# Altium PCB PCB1.PcbDoc
Units mm, origin at the board's own origin, x right, y up, seen from the top; angles counter-clockwise.
Board outline 37.09 x 46.66 mm, 2 copper layers (Top Layer, Bottom Layer); 13 components, 15 nets, 49 pads, 48 vias.
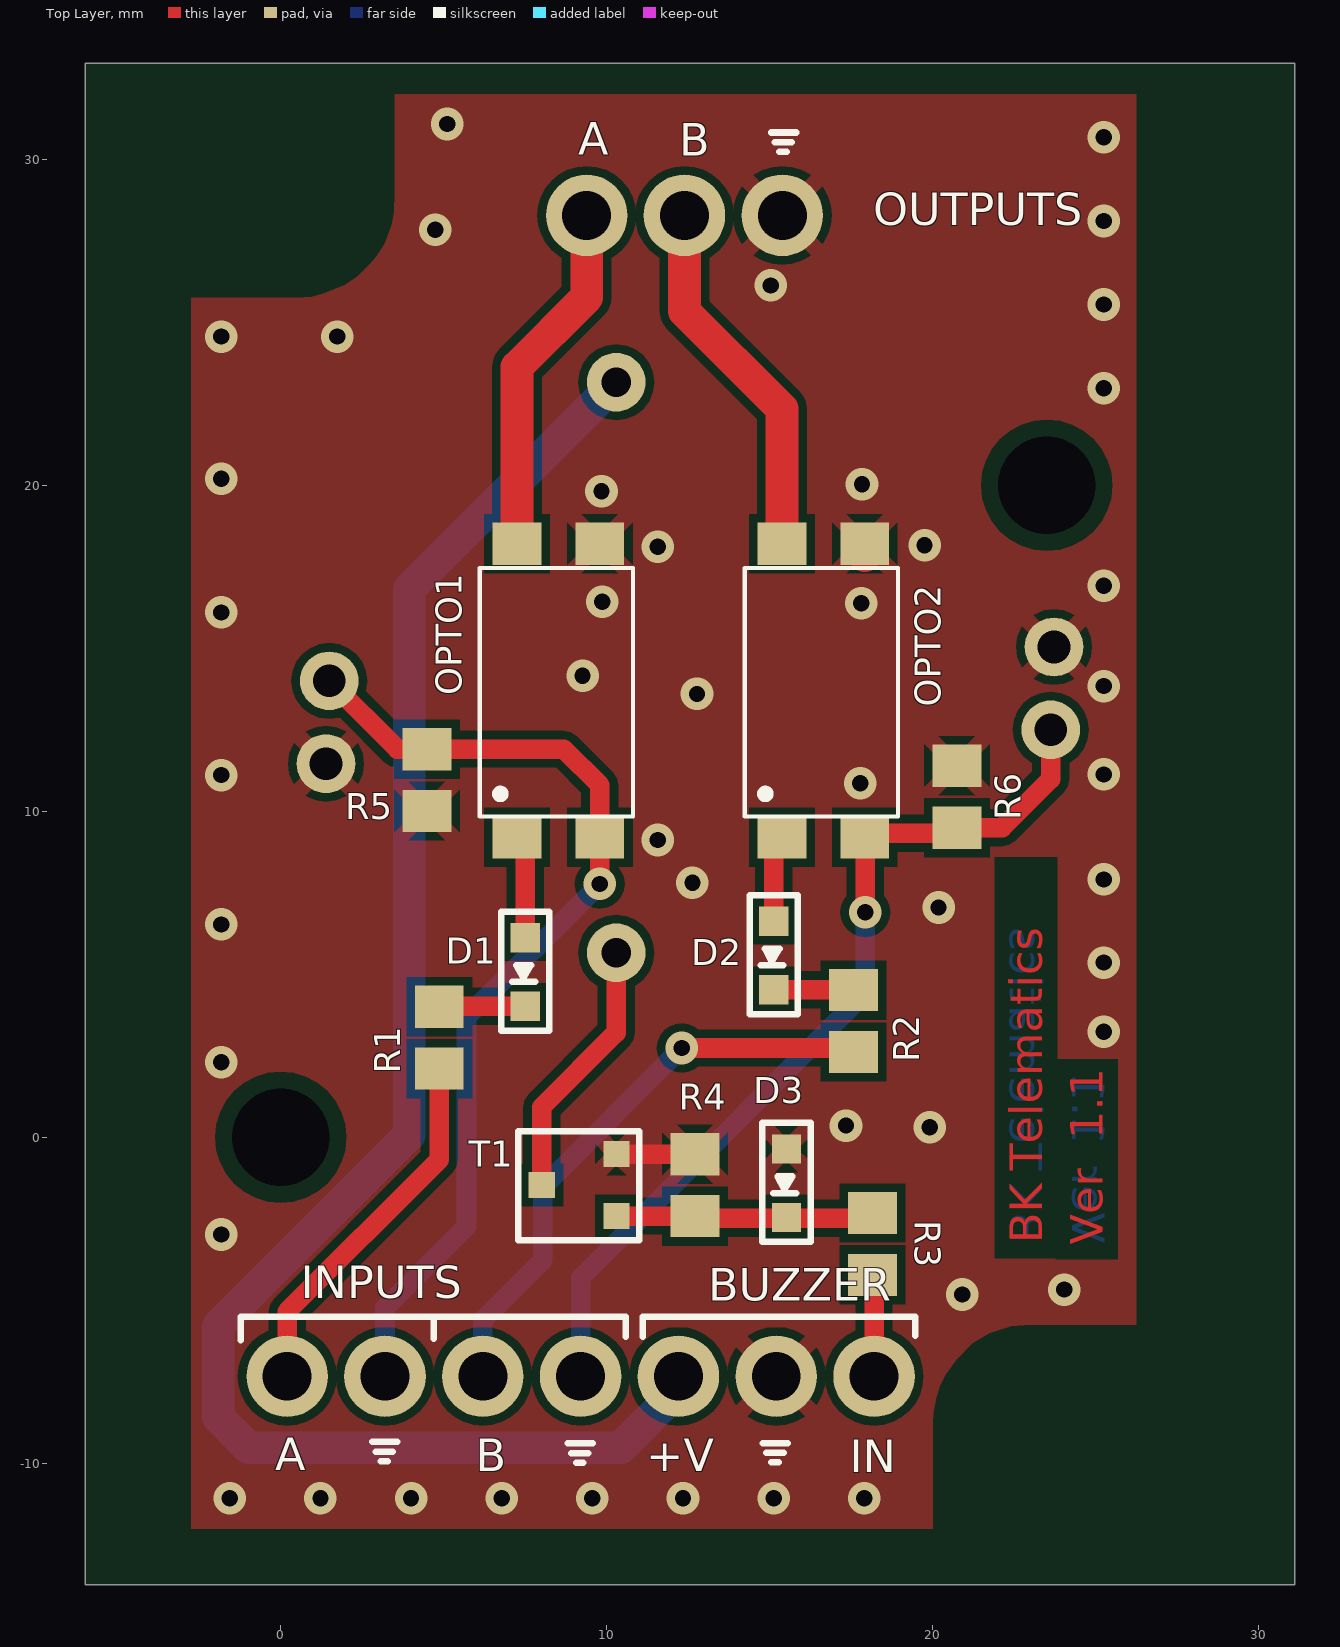
[diagram p0: Top Layer view]
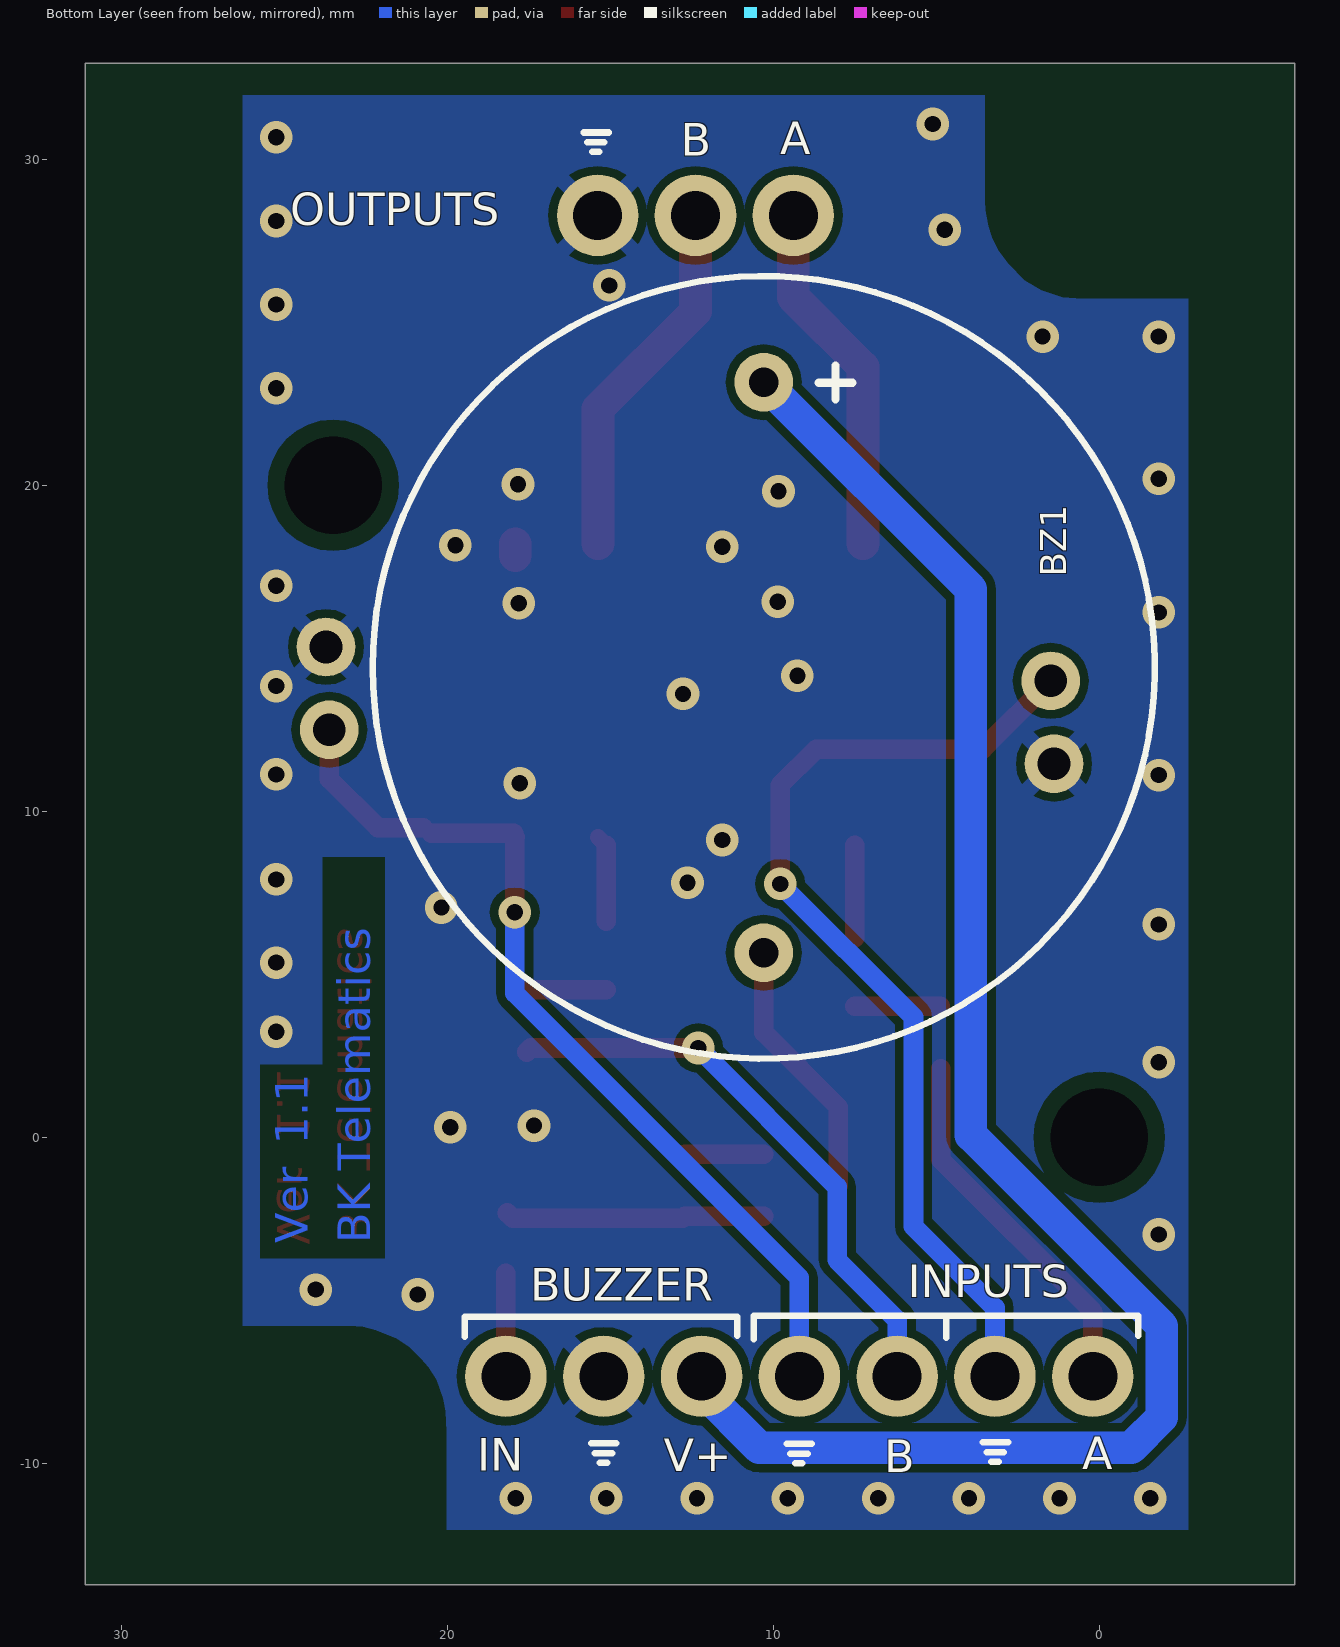
[diagram p1: Bottom Layer view, seen from below]

## Layer stack, top to bottom
Top Layer: signal copper 0.0356
Dielectric: dielectric 0.32, FR-4, Dk 4.8
Bottom Layer: signal copper 0.0356

## Board outline
-5.99,-13.72 31.1,-13.72 31.1,32.94 -5.99,32.94

## Design rules (kind name [scope] priority, off if disabled: settings)
Clearance [All] p1: gap=0.254
PlaneConnect [All] p1: planeconnectstyle=Relief reliefexpansion=0.508 reliefentries=4 reliefconductorwidth=0.4 reliefairgap=0.254
PolygonConnect PolygonConnect_1 [IsVia] p1: connectstyle=Direct reliefconductorwidth=0.254 reliefentries=4 polygonreliefangle="90 Angle"
PolygonConnect [All] p2: connectstyle=Relief reliefconductorwidth=0.5 reliefentries=4 polygonreliefangle="45 Angle"
RoutingVias [All] p1: holewidth=0.711 width=1.27 viastyle="Through Hole" minholewidth=0.711 minwidth=1.27 maxholewidth=0.711 maxwidth=1.27
SilkscreenOverComponentPads [All] p1 off: minsilkscreentomaskgap=0.025
SolderMaskExpansion [All] p1: expansion=0.102
TestPointUsage [All] p1: valid=0 allowmultiple=FALSE
Testpoint [All] p1: side=15 testpointundercomponent=TRUE minsize=1.016 maxsize=2.54 preferedsize=1.524 minholesize=0 maxholesize=1.016 preferedholesize=0.813 testpointgrid=0.025 style=1023 order=0123456789
Width [All] p1: maxlimit=3 minlimit=0.254 preferedwidth=0.254
22 further rules are at their usual default settings.

## Components (designator, comment, footprint, x,y, rotation, side; value= is the part's Value field where it differs from the comment)
BZ1 "ABI-033-RC" ABI-033-RC 10.292,14.412 r180 bottom
D1 "UDZVFHTE-176.8B" UDZVFHTE-176.8B 7.502,5.07 r180 top
D2 "UDZVFHTE-176.8B" UDZVFHTE-176.8B 15.122,5.578 r180 top
D3 "UDZVFHTE-173.6B" UDZVFHTE-176.8B 15.514,-1.41 r180 top
OPTO1 "FOD814S" FOD814 8.518,13.706 r0 top
OPTO2 "FOD814S" FOD814 16.646,13.706 r0 top
R1 "Res Semi" 2012[0805] 4.865,3.059 r90 top
R2 "Res Semi" 2012[0805] 17.565,3.567 r90 top
R3 "Res Semi" 2012[0805] 18.154,-3.272 r90 top
R4 "Res Semi" 2012[0805] 12.709,-1.465 r270 top
R5 "Res Semi" 2012[0805] 4.484,10.958 r270 top
R6 "Res Semi" 2012[0805] 20.74,10.45 r90 top
T1 "MMBT6427" MMBT6427 9.153,-1.465 r90 top

## Footprints (in the part's own frame and the unit in brackets; to place one, negate y for a bottom-side part, rotate by r counter-clockwise, add the part's x,y. Pads: shape width x height; smd on the part's side, far side on the other; paste and mask are expansions set on the pad)
2012[0805] [mm] "Chip Resistor; Body 2.0 x 1.3 mm (LxW typ)"
  rect 1.3x1.5 smd: 1(-0.95,0) 2(0.95,0)
ABI-033-RC [mm]
  round 1.8 hole 0.9: 1(0,8.75) 2(0,-8.75)
  silkscreen extent -12,-12 12,12
FOD814 [mm]
  rect 1.5x1.3 smd: 1(-1.27,-4.5) 2(1.27,-4.5) 3(1.27,4.5) 4(-1.27,4.5)
  silkscreen extent -2.41,-3.86 2.29,3.76, body extent -2.41,-3.86 2.29,3.76, height 3.5
MMBT6427 [mm]
  rect 0.8x0.8 smd: B(-0.95,-1.145) C(0,1.145) E(0.95,-1.145)
  silkscreen extent -1.7,-1.85 1.65,1.86
UDZVFHTE-176.8B [mm]
  rect 0.9x0.9 smd: 1(0,1.05) 2(0,-1.05)
  silkscreen extent -0.74,-1.85 0.74,1.8

## Part data
D3: library part UDZVFHTE-176.8B
OPTO1 OPTO2: "AC Phototransistor Optocoupler"
R1 R2 R3 R4 R5 R6: "Semiconductor Resistor"

## Free pads (board coordinates)
  round 0 hole 3 unplated: 0(0,0) 0(23.5,20)
  round 1.8 hole 1: 0(1.49,14) 0(23.72,15.04) 1(1.39,11.46) 1(23.62,12.5)
  round 3.5 on Keep-Out: 1(0,0) 1(23.5,20)
  round 2.5 hole 1.5: 1(0.2,-7.33) 1(3.2,-7.33) 1(6.2,-7.33) 1(9.2,-7.33) 1(9.386,28.279) 1(12.2,-7.33) 1(12.386,28.279) 1(15.2,-7.33) 1(15.386,28.279) 1(18.2,-7.33)

## Via types
v1: diameter 1, hole 0.5, Top Layer to Bottom Layer, tented both sides, 48 vias

## Nets (pads, with @x,y where several pads share a name; then routed paths per layer and width w, separated by ;. In a path a pad name is that pad's centre, name@x,y a point inside that pad or via, vN(x,y) a via of type N, cw(c..) or ccw(c..) an arc to the next point about the centre after c; other vN are vias at no path point)
GND: D3.2 OPTO1.3 OPTO2.3 pad.0@23.72,15.04 pad.1@1.39,11.46 pad.1@15.2,-7.33 pad.1@15.386,28.279 R4.1 R5.2 R6.2 T1.E | length 2.8
  Top Layer w0.6: T1.E R4.1
  Top Layer w1: OPTO2.3@17.916,17.846 OPTO2.3
  other v1: -1.56,-11.07 1.22,-11.07 4,-11.07 6.78,-11.07 9.56,-11.07 12.34,-11.07 15.12,-11.07 17.9,-11.07 20.91,-4.82 24.03,-4.67 -1.82,-2.98 19.91,0.31 17.34,0.36 -1.82,2.3 25.25,3.24 25.25,5.36 -1.82,6.53 20.18,7.05 12.63,7.81 25.25,7.91 11.57,9.12 17.78,10.86 -1.82,11.11 25.25,11.13 12.77,13.6 25.25,13.84 9.26,14.16 -1.82,16.1 17.81,16.38 9.86,16.43 25.25,16.92 11.57,18.11 19.75,18.16 9.84,19.82 17.83,20.03 -1.82,20.2 25.25,22.98 -1.82,24.56 1.74,24.56 25.25,25.543 15.03,26.13 4.74,27.84 25.25,28.107 25.25,30.67 5.11,31.08
GND_A: OPTO1.2 pad.0@1.49,14 pad.1@3.2,-7.33 R5.1 | length 30.6
  Top Layer w0.6: pad.0@1.39,14 1.49,14 3.582,11.908 8.682,11.908 9.788,10.802 OPTO1.2 v1(9.788,7.772)
  Bottom Layer w0.6: pad.1@3.2,-7.33 3.2,-5.23 5.7,-2.73 5.7,3.685 v1(9.788,7.772)
GND_B: OPTO2.2 pad.1@9.2,-7.33 pad.1@23.62,12.5 R6.1 | length 27.7
  Top Layer w0.6: OPTO2.2 17.93,9.192 v1(17.93,6.9) ; OPTO2.2@17.966,9.326 R6.1@20.496,9.326 ; R6.1 22.13,9.5 23.62,10.99 pad.1@23.62,12.5
  Bottom Layer w0.6: pad.1@9.2,-7.33 9.2,-4.31 10.58,-2.93 17.93,4.42 v1(17.93,6.9)
IN_A: pad.1@0.2,-7.33 R1.1 | length 11.4
  Top Layer w0.6: pad.1@0.2,-7.33 0.2,-5.345 4.865,-0.68 R1.1
IN_B: pad.1@6.2,-7.33 R2.1 | length 17.9
  Top Layer w0.6: v1(12.3,2.74) 17.442,2.74 R2.1
  Bottom Layer w0.6: pad.1@6.2,-7.33 6.2,-5.6 8.04,-3.76 8.04,-1.52 v1(12.3,2.74)
MCU_IN: pad.1@18.2,-7.33 R3.1 | length 3.2
  Top Layer w0.6: pad.1@18.2,-7.33 R3.1@18.2,-4.17
NetBZ1_2: BZ1.2 T1.C | length 8.1
  Top Layer w0.6: T1.C 8.008,0.928 10.292,3.212 BZ1.2
NetD1_1: D1.1 R1.2 | length 2.6
  Top Layer w0.6: R1.2@4.876,4.02 D1.1
NetD1_2: D1.2 OPTO1.1 | length 2.8
  Top Layer w0.6: D1.2 OPTO1.1@7.502,8.952
NetD2_1: D2.1 R2.2 | length 2.4
  Top Layer w0.6: D2.1 17.554,4.528 R2.2
NetD2_2: D2.2 OPTO2.1 | length 2.7
  Top Layer w0.5: OPTO2.1@15.122,8.952 OPTO2.1
  Top Layer w0.6: D2.2 OPTO2.1@15.122,8.952
NetD3_1: D3.1 R3.2 R4.2 T1.B | length 7.9
  Top Layer w0.6: T1.B R4.2 12.775,-2.481 17.995,-2.481 R3.2
OUT_A: OPTO1.4 pad.1@9.386,28.279 | length 11
  Top Layer w1: OPTO1.4 7.248,23.628 9.386,25.766 pad.1@9.386,28.279
OUT_B: OPTO2.4 pad.1@12.386,28.279 | length 11.3
  Top Layer w1: pad.1@12.386,28.279 12.386,25.334 15.376,22.344 OPTO2.4
VCC: BZ1.1 pad.1@12.2,-7.33 | length 52.5
  Bottom Layer w1: BZ1.1 3.94,16.81 3.94,0.07 -1.92,-5.79 -1.92,-8.58 -0.98,-9.52 10.43,-9.52 12.2,-7.75 pad.1@12.2,-7.33

## Polygon pours and split planes (outlines as drawn)
GND on Top Layer "NET" (solid, pour order 1000): -2.75,-12 -2.75,25.75 0.5,25.75 0.95,25.78 1.34,25.89 1.98,26.15 2.37,26.41 2.72,26.76 2.95,27.02 3.19,27.4 3.4,27.98 3.48,28.37 3.5,29 3.5,32 26.25,32 26.25,-5.75 23,-5.75 22.39,-5.8 21.74,-6.01 21.21,-6.32 20.72,-6.82 20.4,-7.26 20.22,-7.64 20.11,-7.98 20.02,-8.47 20,-8.75 20,-12 -2.75,-12
GND on Bottom Layer "NET" (solid, pour order 1001): 26.27,31.97 26.27,-5.78 23.02,-5.78 22.57,-5.81 22.18,-5.92 21.54,-6.18 21.15,-6.44 20.8,-6.79 20.57,-7.05 20.33,-7.43 20.12,-8.01 20.04,-8.4 20.02,-9.03 20.02,-12.03 -2.73,-12.03 -2.73,25.72 0.52,25.72 1.13,25.77 1.78,25.98 2.31,26.29 2.8,26.79 3.12,27.23 3.3,27.61 3.41,27.95 3.5,28.44 3.52,28.72 3.52,31.97 26.27,31.97

## Other copper
Top Layer:
  text "1.1" at 25.22,-0.06 h1 r90
  text "Telematics" at 23.36,-1.02 h1 r90
  text "BK" at 23.36,-3.25 h1 r90
  text "Ver" at 25.22,-3.29 h1 r90
Bottom Layer:
  text "1.1" at 24.28,-0.23 h1 r270
  text "Telematics" at 22.37,-1.02 h1 r270
  text "BK" at 22.37,-3.25 h1 r270
  text "Ver" at 24.28,-3.25 h1 r270

## Silkscreen, mask and mechanical layers (free items; w line width, h text height)
Top Overlay:
  lines w0.2: -1.22,-6.22 -1.22,-5.5 10.58,-5.5 10.58,-6.12 ; 2.803,-9.34 3.573,-9.34 ; 2.913,-9.64 3.443,-9.64 ; 3.063,-9.93 3.283,-9.93 ; 4.69,-6.18 4.69,-5.57 ; 8.8,-9.39 9.57,-9.39 ; 8.91,-9.69 9.44,-9.69 ; 9.06,-9.98 9.28,-9.98 ; 11.1,-6.11 11.1,-5.5 19.47,-5.5 19.47,-6.08 ; 14.79,-9.38 15.56,-9.38 ; 14.9,-9.68 15.43,-9.68 ; 15.04,30.82 15.81,30.82 ; 15.05,-9.97 15.27,-9.97 ; 15.15,30.52 15.68,30.52 ; 15.3,30.23 15.52,30.23
  text "A" at 9.13,30.14 h1
  text "B" at 12.23,30.1 h1
  text "OUTPUTS" at 18.17,27.97 h1
  text "INPUTS" at 0.609,-4.936 h1
  text "BUZZER" at 13.12,-5.02 h1
  text "A" at -0.16,-10.21 h1
  text "B" at 5.99,-10.25 h1
  text "+V" at 11.21,-10.25 h1
  text "IN" at 17.46,-10.27 h1
Bottom Overlay:
  lines w0.2: -1.2,-6.09 -1.2,-5.47 10.6,-5.47 10.6,-6.19 ; 2.8,-9.36 3.57,-9.36 ; 2.93,-9.66 3.46,-9.66 ; 3.09,-9.95 3.31,-9.95 ; 4.69,-6.15 4.69,-5.54 ; 8.817,-9.4 9.587,-9.4 ; 8.947,-9.7 9.477,-9.7 ; 9.107,-9.99 9.327,-9.99 ; 11.1,-6.08 11.1,-5.5 19.47,-5.5 19.47,-6.11 ; 14.81,-9.39 15.58,-9.39 ; 14.94,-9.69 15.47,-9.69 ; 15.05,30.82 15.82,30.82 ; 15.1,-9.98 15.32,-9.98 ; 15.18,30.52 15.71,30.52 ; 15.34,30.23 15.56,30.23
  text "A" at 9.79,30.15 h1
  text "B" at 12.84,30.11 h1
  text "OUTPUTS" at 24.82,27.97 h1
  text "INPUTS" at 5.88,-4.9 h1
  text "BUZZER" at 17.45,-5.02 h1
  text "A" at 0.53,-10.18 h1
  text "IN" at 19.08,-10.22 h1
  text "+V" at 11.28,-10.25 h1
  text "B" at 6.6,-10.28 h1
Mechanical 1:
  lines w0.2: -2.75,-12 -2.75,-7.72 -2.75,25.75 0.5,25.75 ccw(c0.5,28.75) 3.5,28.75 3.5,32 26.25,32 26.25,-5.75 23,-5.75 ccw(c23,-8.75) 20,-8.75 20,-12 -2.75,-12

## Dimensions
3.5,32 to 26.25,32 on Mechanical 1
-2.75,25.75 to -2.75,-12 on Mechanical 1
26.25,-5.75 to 26.25,32 on Mechanical 1
20,-12 to 20,-8.75 on Mechanical 1
-2.75,25.75 to 0.5,25.75 on Mechanical 1